# EAGLE board STM32F405RGT6 s (EAGLE 9.6.2)
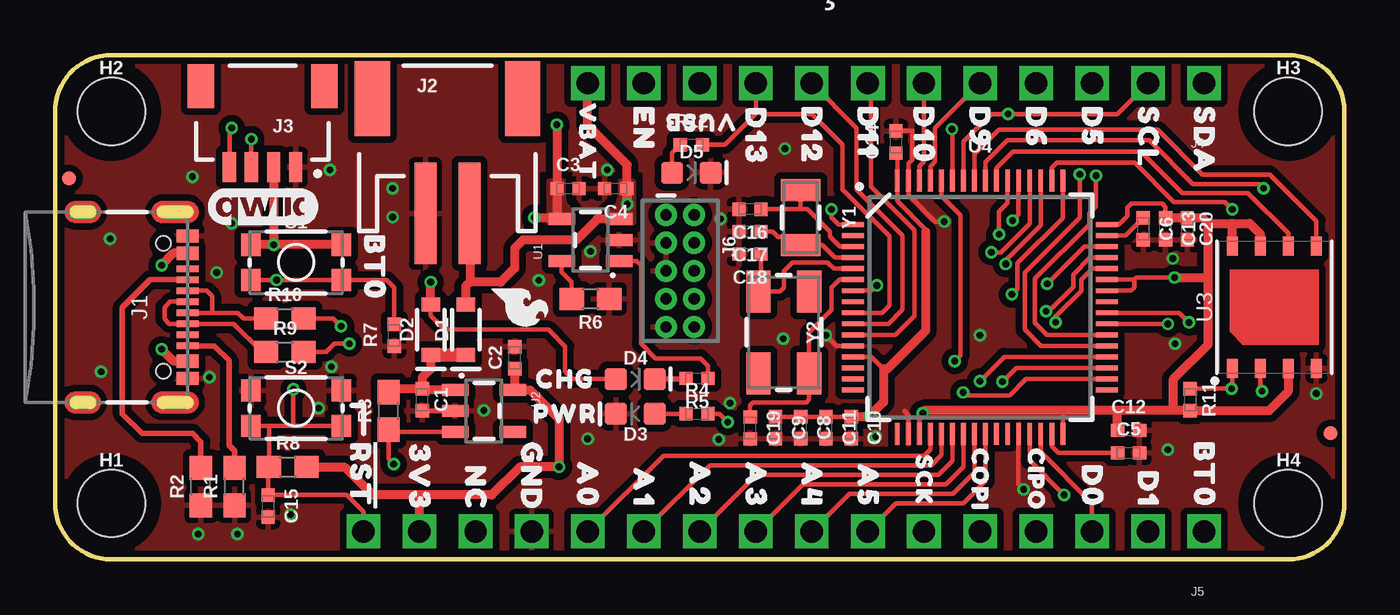
[diagram p0: board, top side]
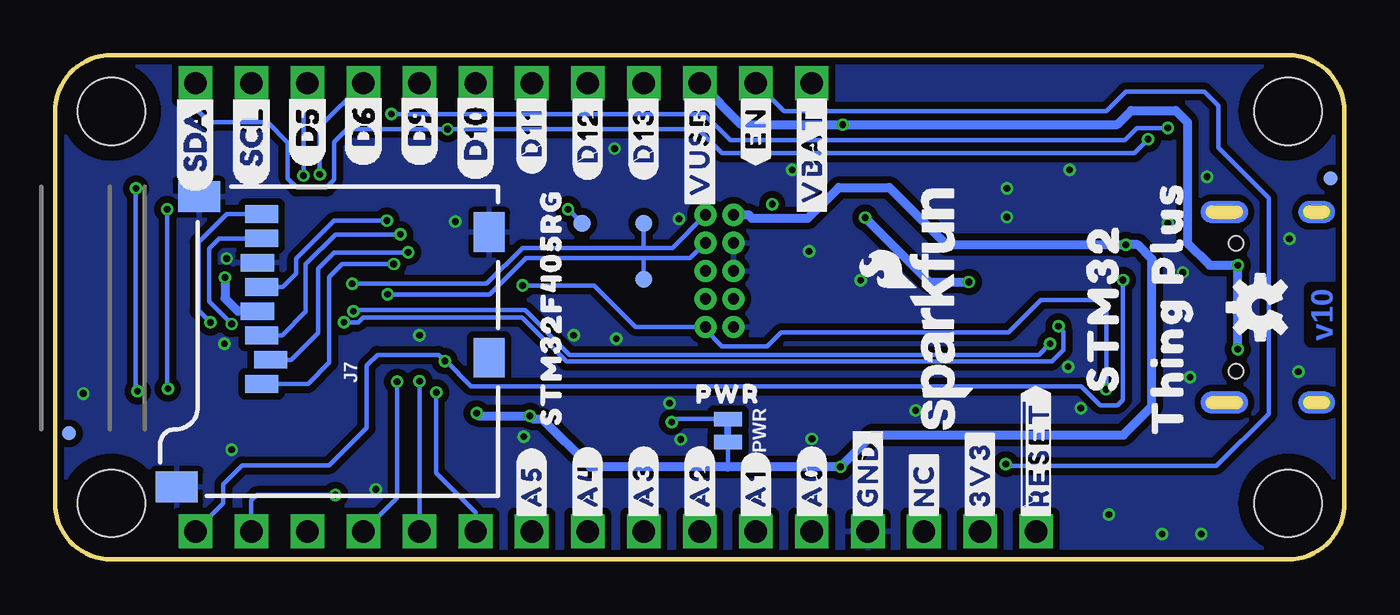
[diagram p1: board, bottom side, seen from below]

Size 58.42 x 22.86 mm. Coordinates in mm from the lower left corner, seen from the top.
Outline: 2.54,0 55.88,0 arc90 58.42,2.54 58.42,20.32 arc90 55.88,22.86 2.54,22.86 arc90 0,20.32 0,2.54 arc90 2.54,0
Copper layers (1*16): Top 0.035mm / dielectric 1.5mm / Bottom 0.035mm
Design rules "SparkFun-2-layer-FAB-LIMIT": minimum track width 4mil, minimum drill 6mil, track to track 4mil, track to pad 4mil, pad to pad 4mil, via to via 4mil, smd to smd 4mil, copper to edge 4mil, drill to drill 4mil, minimum pad ring 5mil, minimum via ring 5mil, stop-mask expansion 4mil, vias tented up to drill 25mil, thermal gap 10mil
Net classes: 1 power: width 0.762 mm

## Footprints (pad centres in the part's own frame; a part is rotated, then mirrored left to right if it is on the bottom)
0402-TIGHT = smd 0.6 x 0.6: 1 -0.5,0; 2 0.5,0
SOD-323 = smd 0.63 x 0.83: A 1.15,0; C -1.15,0
LED-0603 = smd 1 x 1: A -0.877,0; C 0.877,0
FIDUCIAL-MICRO = smd 0.635 x 0.635: 1 0,0
STAND-OFF-TIGHT = hole 3.048: 0,0
USB-C-16P-2LAYER-PADS = smd 0.3 x 1: A5 -1.25,-0.34; A6 -0.25,-0.34; A7 0.25,-0.34; A8 1.25,-0.34; B5 1.75,-0.34; B6 0.75,-0.34; B7 -0.75,-0.34; B8 -1.75,-0.34 | smd 0.6 x 1: GND -3.225,-0.34; GND2 3.225,-0.34; VBUS1 -2.45,-0.34; VBUS2 2.45,-0.34 | drill 0.4 pad 0.6 long: SHLD1 -4.318,-0.915; SHLD2 4.318,-0.915; SHLD3 -4.318,-5.095; SHLD4 4.318,-5.095 | hole 0.65: -2.89,-1.445; 2.89,-1.445
JST-2-SMD = smd 1 x 4.6: 1 -1,-3.7; 2 1,-3.7 | smd 1.6 x 3.4: NC1 -3.4,1.5; NC2 3.4,1.5
JST04_1MM_RA = smd 0.6 x 1.35: 1 -1.5,0; 2 -0.5,0; 3 0.5,0; 4 1.5,0 | smd 1.2 x 2: NC1 2.8,-3.675; NC2 -2.8,-3.675
1X12_SM_SQ_NOSILK = drill 1.016 pad 1.27 square: 1 0,0; 2 2.54,0; 3 5.08,0; 4 7.62,0; 5 10.16,0; 6 12.7,0; 7 15.24,0; 8 17.78,0; 9 20.32,0; 10 22.86,0; 11 25.4,0; 12 27.94,0
1X16_SM_SQ_NOSILK = drill 1.016 pad 1.27 square: 1 0,0; 2 2.54,0; 3 5.08,0; 4 7.62,0; 5 10.16,0; 6 12.7,0; 7 15.24,0; 8 17.78,0; 9 20.32,0; 10 22.86,0; 11 25.4,0; 12 27.94,0; 13 30.48,0; 14 33.02,0; 15 35.56,0; 16 38.1,0
2X5-PTH-1.27MM-NO_SILK = drill 0.508 pad 1: 1 -2.54,-0.635; 2 -2.54,0.635; 3 -1.27,-0.635; 4 -1.27,0.635; 5 0,-0.635; 6 0,0.635; 7 1.27,-0.635; 8 1.27,0.635; 9 2.54,-0.635; 10 2.54,0.635
MICRO-SD-SOCKET = smd 1.8 x 1.4: CD1 -2.05,0.4; CD2 -7.75,0.4 | smd 0.8 x 1.5: CS/DAT3 -7.84,10.3; DAT1 -1.24,10.7; DAT2 -8.94,10.7; DI/CMD -6.74,10.7; DO/DAT0 -2.34,10.7; GND -3.44,10.9; SCLK -4.54,10.7; VCC -5.64,10.9 | smd 1.4 x 1.9: GND1 -13.6,14.55; GND3 -0.45,13.55
SMT-JUMPER_2_NC_TRACE_NO-SILK = smd 0.66 x 1.27: 1 -0.521,0; 2 0.521,0
0603 = smd 1.1 x 1: 1 -0.85,0; 2 0.85,0
TACTILE_SWITCH_SMD_4.6X2.8MM = smd 0.9 x 1: 1 -2.05,-0.8; 2 2.05,-0.8; 3 2.05,0.8; 4 -2.05,0.8
PAD.03X.03 = smd 0.762 x 0.762: P$1 0,0
SOT23-5 = smd 0.55 x 1.2: 1 -0.95,-1.3; 2 0,-1.3; 3 0.95,-1.3; 4 0.95,1.3; 5 -0.95,1.3
WSON-8-6X5 = smd 0.85 x 0.5: 1 -2.775,1.905; 2 -2.775,0.635; 3 -2.775,-0.635; 4 -2.775,-1.905; 5 2.775,-1.905; 6 2.775,-0.635; 7 2.775,0.635; 8 2.775,1.905
TQFP64 = smd 0.22 x 1: 1 -3.75,-5.75; 2 -3.25,-5.75; 3 -2.75,-5.75; 4 -2.25,-5.75; 5 -1.75,-5.75; 6 -1.25,-5.75; 7 -0.75,-5.75; 8 -0.25,-5.75; 9 0.25,-5.75; 10 0.75,-5.75; 11 1.25,-5.75; 12 1.75,-5.75; 13 2.25,-5.75; 14 2.75,-5.75; 15 3.25,-5.75; 16 3.75,-5.75; 33 3.75,5.75; 34 3.25,5.75; 35 2.75,5.75; 36 2.25,5.75; 37 1.75,5.75; 38 1.25,5.75; 39 0.75,5.75; 40 0.25,5.75; 41 -0.25,5.75; 42 -0.75,5.75; 43 -1.25,5.75; 44 -1.75,5.75; 45 -2.25,5.75; 46 -2.75,5.75; 47 -3.25,5.75; 48 -3.75,5.75 | smd 1 x 0.22: 17 5.75,-3.75; 18 5.75,-3.25; 19 5.75,-2.75; 20 5.75,-2.25; 21 5.75,-1.75; 22 5.75,-1.25; 23 5.75,-0.75; 24 5.75,-0.25; 25 5.75,0.25; 26 5.75,0.75; 27 5.75,1.25; 28 5.75,1.75; 29 5.75,2.25; 30 5.75,2.75; 31 5.75,3.25; 32 5.75,3.75; 49 -5.75,3.75; 50 -5.75,3.25; 51 -5.75,2.75; 52 -5.75,2.25; 53 -5.75,1.75; 54 -5.75,1.25; 55 -5.75,0.75; 56 -5.75,0.25; 57 -5.75,-0.25; 58 -5.75,-0.75; 59 -5.75,-1.25; 60 -5.75,-1.75; 61 -5.75,-2.25; 62 -5.75,-2.75; 63 -5.75,-3.25; 64 -5.75,-3.75
CRYSTAL-SMD-3.2X1.5MM = smd 1 x 1.8: P$1 -1.25,0; P$2 1.25,0
CRYSTAL-SMD-5X3.2-4PAD = smd 1.9 x 1.1: 1 -1.85,-1.15; 2 1.85,-1.15; 3 1.85,1.15; 4 -1.85,1.15

## Placement (x,y rotation side)
C1  1.0uF  [0402-TIGHT]  16.64,7.24 270 top
C2  1.0uF  [0402-TIGHT]  20.83,9.14 90 top
C3  4.7uF  [0402-TIGHT]  23.24,16.81 0 top
C4  4.7uF  [0402-TIGHT]  25.4,16.81 180 top
C5  2.2uF  [0402-TIGHT]  48.64,4.83 0 top
C6  2.2uF  [0402-TIGHT]  49.3,14.99 270 top
C8  0.1uF  [0402-TIGHT]  33.78,5.97 270 top
C9  1.0uF  [0402-TIGHT]  32.64,5.97 270 top
C10  4.7uF  [0402-TIGHT]  36.07,5.97 270 top
C11  0.1uF  [0402-TIGHT]  34.92,5.97 270 top
C12  0.1uF  [0402-TIGHT]  48.64,5.84 0 top
C13  0.1uF  [0402-TIGHT]  50.32,14.99 270 top
C14  0.1uF  [0402-TIGHT]  38.1,18.92 90 top
C15  0.1uF  [0402-TIGHT]  9.65,2.41 270 top
C16  15pF  [0402-TIGHT]  31.49,15.88 180 top
C17  15pF  [0402-TIGHT]  31.49,14.86 180 top
C18  22pF  [0402-TIGHT]  31.49,13.84 180 top
C19  22pF  [0402-TIGHT]  31.5,5.96 270 top
C20  0.1uF  [0402-TIGHT]  51.31,14.99 270 top
D1  3A/10V/280mV  [SOD-323]  18.61,10.41 90 top
D2  3A/10V/280mV  [SOD-323]  17.02,10.41 90 top
D3  RED  [LED-0603]  26.29,6.6 180 top
D4  Yellow  [LED-0603]  26.29,8.18 0 top
D5  BLUE  [LED-0603]  28.83,17.53 0 top
FD1  FIDUCIALUFIDUCIAL  [FIDUCIAL-MICRO]  0.64,17.27 0 top
FD2  FIDUCIALUFIDUCIAL  [FIDUCIAL-MICRO]  0.64,17.27 0 bottom
FD3  FIDUCIALUFIDUCIAL  [FIDUCIAL-MICRO]  57.78,5.71 0 top
FD4  FIDUCIALUFIDUCIAL  [FIDUCIAL-MICRO]  57.78,5.71 0 bottom
H1  STAND-OFFTIGHT  [STAND-OFF-TIGHT]  2.54,2.54 0 top
H2  STAND-OFFTIGHT  [STAND-OFF-TIGHT]  2.54,20.32 0 top
H3  STAND-OFFTIGHT  [STAND-OFF-TIGHT]  55.88,20.32 0 top
H4  STAND-OFFTIGHT  [STAND-OFF-TIGHT]  55.88,2.54 0 top
J1  [USB-C-16P-2LAYER-PADS]  6.35,11.43 270 top
J2  [JST-2-SMD]  17.78,19.38 0 top
J3  QWIIC_RA  [JST04_1MM_RA]  9.4,17.78 180 top
J4  [1X12_SM_SQ_NOSILK]  52.07,21.59 180 top
J5  [1X16_SM_SQ_NOSILK]  52.07,1.27 180 top
J6  CORTEX_DEBUG  [2X5-PTH-1.27MM-NO_SILK]  28.32,13.08 270 top
J7  MICRO-SD  [MICRO-SD-SOCKET]  38.35,16.89 90 bottom
LOGO1  QWIIC_LOGO_5MM  [QWIIC_5MM]  9.4,16 0 top
LOGO2  SFE_LOGO_NAME_FLAME.1_INCH  [SFE_LOGO_NAME_FLAME_.1]  18.29,11.43 90 bottom
LOGO3  OSHW-LOGOS  [OSHW-LOGO-S]  3.81,11.43 90 bottom
PWR  [SMT-JUMPER_2_NC_TRACE_NO-SILK]  27.94,5.84 270 bottom
R1  5.1k  [0603]  8.13,3.3 90 top
R2  5.1k  [0603]  6.6,3.3 90 top
R3  10k  [0603]  15.11,6.73 90 top
R4  1k  [0402-TIGHT]  29.08,6.6 0 top
R5  1k  [0402-TIGHT]  29.08,8.2 180 top
R6  2.0k  [0603]  24.26,11.81 180 top
R7  100k  [0402-TIGHT]  15.37,10.16 90 top
R8  4.7k  [0603]  10.54,4.19 0 top
R9  22  [0603]  10.41,9.4 0 top
R10  22  [0603]  10.41,10.92 0 top
R11  100k  [0402-TIGHT]  51.44,7.24 270 top
R12  1k  [0402-TIGHT]  28.83,18.8 0 top
S1  [TACTILE_SWITCH_SMD_4.6X2.8MM]  10.92,13.46 0 top
S2  [TACTILE_SWITCH_SMD_4.6X2.8MM]  10.92,6.86 0 top
TP1  [PAD.03X.03]  31.75,15.24 0 bottom
TP2  [PAD.03X.03]  31.75,12.7 0 bottom
U1  MCP73831  [SOT23-5]  24.26,14.48 90 top
U2  3.3V  [SOT23-5]  19.43,6.73 270 top
U3  W25QXX128MBIT-6X5  [WSON-8-6X5]  55.24,11.43 90 top
U4  STM32F405RGT6  [TQFP64]  41.91,11.43 270 top
U$1  [D53]  46.99,17.78 90 bottom
U$2  [#RST#0]  13.97,5.97 270 top
U$3  [BT00]  14.48,11.05 270 top
U$4  [D130]  31.75,19.18 270 top
U$5  [PWR0]  23.11,6.6 0 top
U$6  [CHG0]  23.11,8.18 0 top
U$7  [##RESET##0]  13.97,1.65 90 bottom
U$8  [#3V3#0]  16.51,1.65 90 bottom
U$9  [#NC#0]  19.05,1.65 90 bottom
U$10  [#GND#0]  21.59,1.65 90 bottom
U$11  [#A0#0]  24.13,1.65 90 bottom
U$12  [#A1#0]  26.67,1.65 90 bottom
U$13  [#A2#0]  29.21,1.65 90 bottom
U$14  [#A3#0]  31.75,1.65 90 bottom
U$15  [#A4#0]  34.29,1.65 90 bottom
U$16  [#A5#0]  36.83,1.65 90 bottom
U$23  [D62]  44.45,17.78 90 bottom
U$24  [D91]  41.91,17.78 90 bottom
U$25  [D100]  39.37,17.14 90 bottom
U$26  [SCL4]  49.53,16.89 90 bottom
U$27  [SDA5]  52.07,16.64 90 bottom
U$29  [#D11#0]  36.83,21.21 90 bottom
U$30  [#D12#0]  34.29,21.21 90 bottom
U$31  [#D13#0]  31.75,21.21 90 bottom
U$32  [#VUSB#0]  29.21,21.21 90 bottom
U$33  [#EN#0]  26.67,21.21 90 bottom
U$34  [#VBAT#0]  24.13,21.21 90 bottom
U$35  [3V30]  16.51,1.52 270 top
U$36  [NC0]  19.05,1.52 270 top
U$37  [GND0]  21.59,1.52 270 top
U$38  [A00]  24.13,1.65 270 top
U$39  [A10]  26.67,1.65 270 top
U$40  [A20]  29.21,1.65 270 top
U$41  [A30]  31.75,1.65 270 top
U$42  [A40]  34.29,1.65 270 top
U$43  [A50]  36.83,1.65 270 top
U$44  [SCK0]  39.37,1.91 270 top
U$45  [COPI0]  41.91,1.65 270 top
U$46  [CIPO0]  44.45,1.65 270 top
U$47  [D00]  46.99,1.65 270 top
U$48  [D10]  49.53,1.65 270 top
U$49  [BT00]  52.07,1.65 270 top
U$50  [VBAT_0]  24.13,21.21 270 top
U$51  [EN_0]  26.67,21.21 270 top
U$52  [D50]  46.99,21.21 270 top
U$53  [D60]  44.45,21.21 270 top
U$54  [D90]  41.91,21.21 270 top
U$55  [D100]  39.37,21.21 270 top
U$56  [D110]  36.83,21.21 270 top
U$57  [D120]  34.29,21.21 270 top
U$58  [PWR0]  27.94,7.49 0 bottom
U$59  [SCL_0]  49.53,21.21 270 top
U$60  [SDA_0]  52.07,21.21 270 top
U$61  [VUSB0]  29.21,19.81 180 top
U$62  [STM320]  10.92,11.43 90 bottom
U$63  [THING_PLUS0]  8,11.43 90 bottom
U$64  [STM32F405RG0]  35.94,11.43 90 bottom
U$65  [SFE_LOGO_FLAME_.1]  21.08,11.43 270 top
VB  [PAD.03X.03]  34.54,15.24 0 bottom
Y1  32.768kHz  [CRYSTAL-SMD-3.2X1.5MM]  33.78,15.49 270 top
Y2  12MHz  [CRYSTAL-SMD-5X3.2-4PAD]  33.02,10.29 270 top

## Library data of the parts
C1 C2 C9 = SparkFun-Capacitors; PROD_ID: CAP-12417
C3 C4 C10 = SparkFun-Capacitors; PROD_ID: CAP-14240
C5 C6 = SparkFun-Capacitors; PROD_ID: CAP-14232
C8 C11-C15 C20 = SparkFun-Capacitors; PROD_ID: CAP-15083
C16 C17 = SparkFun-Capacitors; PROD_ID: CAP-13063
C18 C19 = SparkFun-Capacitors; PROD_ID: CAP-14674
D1 D2 = SparkFun-DiscreteSemi; PROD_ID: DIO-14072
D3 = SparkFun-LED; PROD_ID: DIO-00819
D4 = SparkFun-LED; PROD_ID: DIO-09003
D5 = SparkFun-LED; PROD_ID: DIO-08575
FD1-FD4 LOGO1-LOGO3 U$65 = SparkFun-Aesthetics
H1-H4 = SparkFun-Hardware
J1 = SparkFun-Connectors; PROD_ID: CONN-14122
J2 = SparkFun-Connectors; PROD_ID: CONN-11443; SF_ID: PRT-08612
J3 = SparkFun-Connectors; PROD_ID: CONN-13694
J4-J6 TP1 TP2 VB = SparkFun-Connectors
J7 = SparkFun-Connectors; PROD_ID: CONN-07820
PWR = SparkFun-Jumpers
R1 R2 = SparkFun-Resistors; PROD_ID: RES-12083
R3 = SparkFun-Resistors; PROD_ID: RES-00824
R4 R5 R12 = SparkFun-Resistors; PROD_ID: RES-14342
R6 = SparkFun-Resistors; PROD_ID: RES-08296
R7 R11 = SparkFun-Resistors; PROD_ID: RES-13495
R8 = SparkFun-Resistors; PROD_ID: RES-07857
R9 R10 = SparkFun-Resistors; PROD_ID: RES-08698
S1 S2 = SparkFun-Switches; PROD_ID: SWCH-13065
U1 = SparkFun-IC-Power; PROD_ID: IC-09995
U2 = SparkFun-IC-Power; PROD_ID: VREG-12457
U3 = SparkFun-MicroMod; PROD_ID: IC-15107
U4 = STM32_Temp; PROD_ID: IC-11709
U$1 U$23-U$27 = buzzard_labels
U$2-U$16 U$29-U$64 = output
Y1 = SparkFun-Clocks; PROD_ID: XTAL-13062
Y2 = SparkFun-Clocks; PROD_ID: XTAL-08297

## Nets
3.3V: C2.1 C8.1 C9.1 C10.1 C11.1 C12.1 C13.1 C14.1 C20.1 J3.2 J5.15 J6.1 J7.VCC PWR.2 R8.2 R11.2 S1.3 S1.4 U2.5 U3.3 U3.7 U3.8 U4.13 U4.19 U4.32 U4.42 U4.43 U4.48 U4.64
32KHZ_IN: C16.1 U4.3 Y1.P$1
32KHZ_OUT: C17.1 U4.4 Y1.P$2
!RESET: C15.1 J5.16 J6.10 R8.1 S2.1 S2.2 U4.7
A0: J5.12 U4.20
A1: J5.11 U4.21
A2: J5.10 U4.22
A3: J5.9 U4.23
A4: J5.8 U4.24
A5: J5.7 U4.25
BOOT0: J5.1 R7.2 S1.1 S1.2 U4.60
CIPO: J5.4 U4.35
COPI: J5.5 U4.36
D0/RX: J5.3 U4.30
D1/TX: J5.2 U4.29
D5: J4.3 U4.38
D6: J4.4 U4.37
D9: J4.5 U4.61
D10: J4.6 U4.62
D11: J4.7 U4.11
D12: J4.8 U4.10
D13: J4.9 R12.2 U4.9
D+: R9.2 U4.45
D-: R10.2 U4.44
EN: J4.11 R3.1 U2.3
FLASH_!CS: R11.1 U3.1 U4.50
FLASH_SCK: U3.6 U4.55
FLASH_SDI: U3.5 U4.57
FLASH_SDO: U3.2 U4.56
GND: C1.2 C2.2 C3.2 C4.2 C5.2 C6.2 C8.2 C9.2 C10.2 C11.2 C12.2 C13.2 C14.2 C15.2 C16.2 C17.2 C18.2 C19.2 C20.2 D3.C D5.C J1.GND J1.GND2 J1.SHLD1 J1.SHLD2 J1.SHLD3 J1.SHLD4 J2.1 J3.1 J5.13 J6.3 J6.5 J6.9 J7.CD1 J7.GND J7.GND1 J7.GND3 R1.1 R2.1 R6.1 R7.1 S2.3 S2.4 U1.2 U2.2 U3.4 U4.12 U4.18 U4.28 U4.63
N$1: D5.A R12.1
N$2: PWR.1 R4.2
N$3: J1.A6 J1.B6 R9.1
N$6: J1.A7 J1.B7 R10.1
N$7: D3.A R4.1
N$8: R6.2 U1.5
N$9: J1.A5 R2.2
N$10: J1.B5 R1.2
N$14: D4.C R5.2
N$15: R5.1 U1.1
N$16: C5.1 U4.31
N$18: C6.1 U4.47
OSC_IN: C18.1 U4.5 Y2.1
OSC_OUT: C19.1 U4.6 Y2.3
SCK: J5.6 U4.34
SCL: J3.4 J4.2 U4.58
SDA: J3.3 J4.1 U4.59
SDIO_CLK: J7.SCLK U4.53
SDIO_CMD: J7.DI/CMD U4.54
SDIO_D0: J7.DO/DAT0 U4.39
SDIO_D1: J7.DAT1 U4.40
SDIO_D2: J7.DAT2 U4.51
SDIO_D3: J7.CS/DAT3 U4.52
SWCLK: J6.4 TP2.P$1 U4.49
SWDIO: J6.2 TP1.P$1 U4.46
V_BATT: C4.1 D1.A J2.2 J4.12 U1.3
V_USB: C3.1 D2.A D4.A J1.VBUS1 J1.VBUS2 J4.10 U1.4
VB: U4.1 VB.P$1
VIN: C1.1 D1.C D2.C R3.2 U2.1

## Tracks (layer width: path | path; a pad name or v marks a point on that pad's centre or on a via)
3.3V  (via drill 0.3)
  Top 0.203: C14.1 38.16,18.36 U4.64 38.16,16.25 39.45,14.96 39.45,14.86 | C9.1 C8.1 C11.1 C10.1 | U4.13 37,9.18 37.54,8.64 | U4.32 45.66,6.76 45.67,6.76 | U4.42 48.76,12.18 48.9,12.32 48.9,12.68 | 48.9,12.68 U4.43 | v50.72,12.78 48.99,12.78 48.9,12.68 | C13.1 50.32,15.98 50.16,16.13 48.77,16.13 48.59,15.95 48.59,15.57 48.2,15.18 U4.48 | U4.19 39.16,6.47 v39.32,6.63
  Top 0.406: v50.72,12.78 52.25,12.78 | 52.25,12.78 52.25,15.23 | 52.25,15.23 53.34,15.23 | 53.34,15.23 54.13,15.23 54.61,14.76 U3.7 | U3.8 53.34,15.23 | U3.3 55.88,7.62 55,6.74 R11.2 51.44,6.76 50.67,6.76 | C10.1 36.87,6.47 v36.91,6.5 37.54,7.14 37.54,8.64 37.72,8.64 39.45,10.36 39.45,14.86 | 50.67,6.76 48.14,6.76 | 48.14,6.76 45.67,6.76 39.45,6.76 v39.32,6.63 | C12.1 48.14,6.76 | R8.2 13.11,4.19 14.38,2.92 16.51,2.92 | 16.51,2.92 19.79,2.92 21.06,4.19 v22.84,4.19 22.84,6.38 21.53,7.68 U2.5 20.83,7.78 C2.1 | S1.3 v9.9,14.26 | v9.9,14.26 S1.4 | J3.2 v9.9,14.26 | J5.15 16.51,2.92 | 50.67,6.76 50.67,8.18 52.25,9.75 52.25,12.78 | C13.1 C20.1 51.99,15.49 52.25,15.23
  Bottom 0.203: PWR.2 27.94,4.19
  Bottom 0.406: v50.72,12.78 50.72,11.83 50.14,11.25 J7.VCC | J6.1 27,15.62 26.85,15.47 24.31,15.47 22.91,16.87 20.62,16.87 18.02,14.26 v9.9,14.26 9.37,14.26 8.71,13.61 8.71,6.93 10.01,5.64 21.39,5.64 v22.84,4.19 27.94,4.19 34.16,4.19 36.35,6.38 36.78,6.38 v36.91,6.5 39.19,6.5 v39.32,6.63
32KHZ_IN
  Top 0.203: U4.3 35.55,14.18 35.1,14.63 35.1,14.86 34.09,15.88 33.78,15.88 | 33.78,15.88 C16.1 | Y1.P$1 33.78,15.88
32KHZ_OUT
  Top 0.203: U4.4 35.34,13.68 34.78,14.24 Y1.P$2 33.78,14.61 32.75,14.61 32.5,14.86 C17.1
!RESET  (via drill 0.3)
  Top 0.203: S2.1 9.69,6.06 | 10.79,6.06 9.69,6.06 | v10.79,7.71 10.79,6.06 | 10.79,6.06 S2.2 | 9.69,6.06 R8.1 9.65,4.19 9.65,2.92 | C15.1 9.65,2.92 | J5.16 13.97,2.16 13.21,2.92 9.65,2.92 | U4.7 37,12.18 v37.24,12.42
  Bottom 0.203: v37.24,12.42 34.01,12.42 32.13,10.54 J6.10 28.96,10.41 28.19,9.65 26.16,9.65 25.53,10.29 15.21,10.29 13.74,11.76 11.07,11.76 10.79,11.48 v10.79,7.71
A0
  Top 0.203: U4.20 39.66,4.99 39.37,4.7 27.56,4.7 J5.12
A1
  Top 0.203: U4.21 40.16,4.73 39.7,4.27 29.67,4.27 J5.11
A2
  Top 0.203: U4.22 40.66,4.46 40.03,3.83 31.77,3.83 J5.10
A3
  Top 0.203: U4.23 41.16,4.2 40.36,3.4 33.88,3.4 J5.9
A4
  Top 0.203: U4.24 41.66,3.94 40.69,2.97 35.99,2.97 J5.8
A5
  Top 0.203: U4.25 42.16,3.55 41.15,2.54 38.1,2.54 J5.7
BOOT0  (via drill 0.3)
  Top 0.203: R7.2 15.37,12.32 15.02,12.66 S1.2 v10.03,12.66 S1.1 | U4.60 40.16,16.47 41.02,15.61 41.02,9.25 v40.77,8.99
  Bottom 0.203: J5.1 50.8,2.54 50.8,3.4 49.94,4.27 46,4.27 44.3,5.97 44.3,8.79 43.81,9.27 41.05,9.27 v40.77,8.99 40.72,8.99 39.57,7.85 11.91,7.85 11.05,6.99 10.29,6.99 10.03,7.24 v10.03,12.66
CIPO  (via drill 0.3)
  Top 0.203: v42.93,8.05 43.55,8.68 U4.35
  Bottom 0.203: J5.4 42.93,2.79 v42.93,8.05
COPI  (via drill 0.3)
  Top 0.203: U4.36 43.01,9.18 v41.91,8.08
  Bottom 0.203: J5.5 v41.91,8.08
D0/RX
  Top 0.203: J5.3 46.99,2.54 44.66,4.87 U4.30
D1/TX  (via drill 0.3)
  Top 0.203: U4.29 44.16,4.48 v45.72,2.92
  Bottom 0.203: v45.72,2.92 49.28,2.92 49.53,2.67 J5.2
D5  (via drill 0.3)
  Top 0.203: U4.38 44.94,10.18 44.4,10.72 44.4,12.72 46.86,15.19 46.86,15.7 47.17,16 v47.17,17.4
  Bottom 0.203: J4.3 47.17,21.41 v47.17,17.4
D6  (via drill 0.3)
  Top 0.203: U4.37 44.68,9.68 43.94,10.41 43.94,13 46.43,15.49 v46.43,17.45
  Bottom 0.203: v46.43,17.45 46.43,19.61 J4.4
D9
  Top 0.203: U4.61 39.66,17.82 39.88,18.03 39.88,19.56 J4.5
D10
  Top 0.203: U4.62 39.16,17.82 39.37,18.03 J4.6
D11
  Top 0.203: U4.11 38.07,10.18 38.93,11.04 38.93,14.92 36.96,16.89 36.96,21.46 J4.7
D12
  Top 0.203: U4.10 37.76,10.68 38.4,11.32 38.4,14.69 36.32,16.76 36.32,19.56 J4.8
D13
  Top 0.203: U4.9 37.47,11.18 37.8,11.51 37.8,14.66 35.69,16.76 35.69,18.8 34.29,20.19 32,20.19 31.87,20.32 | 31.87,20.32 31.75,20.44 J4.9 | R12.2 30.35,18.8 31.87,20.32
D+  (via drill 0.3)
  Top 0.203: R9.2 12.28,9.4 12.66,9.78 v13.34,9.78 | v44.91,11.25 45.03,11.25 46.14,12.35 46.14,12.92 46.9,13.68 U4.45
  Bottom 0.2: v44.91,11.25 44.86,11.3 37.13,11.3
  Bottom 0.203: 37.13,11.3 35.1,9.27 13.84,9.27 v13.34,9.78
D-  (via drill 0.3)
  Top 0.203: R10.2 12.6,10.92 v12.95,10.57 | U4.44 47.01,13.18 46.5,12.68 46.5,12.17 45.34,11 v45.34,10.75 | v12.95,10.57
  Bottom 0.2: v45.34,10.75 44.7,10.75 44.48,10.97 37.26,10.97
  Bottom 0.203: 37.26,10.97 35.25,8.97 13.26,8.97 12.72,9.5 12.72,10.34 v12.95,10.57
EN  (via drill 0.3)
  Top 0.203: U2.3 15.21,5.78 R3.1 15.11,4.55 v15.34,4.32
  Bottom 0.203: v15.34,4.32 15.27,4.24 5.79,4.24 3.43,6.6 3.43,16.38 5.71,18.67 5.71,20.57 6.35,21.21 9.91,21.21 10.79,20.32 25.4,20.32 J4.11
FLASH_!CS  (via drill 0.3)
  Top 0.203: U3.1 53.34,7.74 v53.31,7.74 R11.1 | U4.50 45.16,17.75 45.39,17.98 48.92,17.98 50.7,16.2 53.01,16.2 v53.34,15.88
  Bottom 0.203: v53.34,15.88 53.34,7.76 v53.31,7.74
FLASH_SCK
  Top 0.203: U3.6 55.88,14.78 54.05,16.61 51.08,16.61 49.2,18.49 43.41,18.49 42.66,17.74 U4.55
FLASH_SDI
  Top 0.203: U4.57 41.66,18.37 42.77,19.48 49.96,19.48 51.99,17.45 55.04,17.45 57.15,15.34 U3.5
FLASH_SDO  (via drill 0.3)
  Top 0.203: U4.56 42.16,18 43.16,19 49.58,19 51.56,17.02 54.56,17.02 v54.76,16.82 | U3.2 54.61,7.7 v54.69,7.62
  Bottom 0.203: v54.76,16.82 54.76,7.7 v54.69,7.62
GND  (via drill 0.3)
  Top 0.203: U2.2 C1.2 | U4.12 35.41,9.68 v34.92,10.16 | C14.2 38.11,19.43 38.85,19.43 38.85,18.13 38.66,17.94 U4.63 38.66,16.53 39.88,15.32 v40.28,15.32 | U4.28 43.66,3.41 v43.89,3.17 | U4.18 38.66,6.55 38.48,6.73
  other vias: 25.02,17.65 6.99,8.26 8,15.24 6.48,1.14 8.26,1.14 10.67,2.03 19.43,6.76 11.94,6.86 12.45,17.65 15.29,16.81 15.29,15.52 21.92,12.65 24.26,13.97 32.99,10.01 30.15,15.44 12.52,8.74 50.75,9.78 50.42,4.98 30.58,7.09 24.13,5.46 2.49,14.53 2.08,8.51 7.32,13 6.22,17.35 30.07,5.44 37.19,5.56 33.07,18.62 57.15,7.52 41.91,10.16 50.65,13.64
  pour Top (isolate 0.305, rank 2): 0,0 0,22.86 58.42,22.86 58.42,0
  pour Bottom (isolate 0.305, rank 2): 0,22.86 0,0 58.42,0 58.42,22.86
N$1
  Top 0.203: R12.1 27.95,18.42 D5.A
N$2  (via drill 0.3)
  Top 0.203: v30.48,6.22 30.1,6.6 R4.2
  Bottom 0.203: PWR.1 30.34,6.36 v30.48,6.22
N$3
  Top 0.203: R9.1 9.37,9.4 8.09,10.68 J1.B6 5.17,10.68 4.95,10.9 4.95,11.43 5.2,11.68 J1.A6
N$6
  Top 0.203: R10.1 8.53,10.92 8.28,11.18 7.11,11.18 | J1.A7 7.11,11.18 | J1.B7 6.87,12.18 7.11,11.94 7.11,11.18
N$7
  Top 0.203: R4.1 D3.A
N$8
  Top 0.203: U1.5 22.96,13.02 23.41,12.57 R6.2
N$9
  Top 0.254: R2.2 6.6,5.33 6.22,5.71 3.94,5.71 3.05,6.6 3.05,11.43 4.3,12.68 J1.A5
N$10
  Top 0.254: J1.B5 7.21,9.68 7.87,9.02 7.87,5.17 8.13,4.91 R1.2
N$14
  Top 0.254: R5.2 28.56,8.18 D4.C
N$15
  Top 0.203: U1.1 26.35,13.53 26.54,13.34 26.54,9.78 27.2,9.12 29.23,9.12 29.58,8.77 R5.1
N$16
  Top 0.203: C5.1 45.47,4.83 45.16,5.13 U4.31
N$18
  Top 0.203: C6.1 48.49,14.68 U4.47
OSC_IN
  Top 0.203: U4.5 35.28,13.18 35,13.46 33.4,13.46 33.02,13.08 33.02,12.32 32.84,12.14 Y2.1 31.99,12.26 C18.1
OSC_OUT
  Top 0.203: C19.1 31.5,6.99 31.62,7.11 34.04,7.11 34.17,7.25 Y2.3 34.17,10.29 35.18,11.3 35.18,12.32 35.54,12.68 U4.6
SCK  (via drill 0.3)
  Top 0.203: v41.15,7.57 41.27,7.44 43.26,7.44 43.99,8.18 U4.34
  Bottom 0.203: J5.6 39.37,2.13 41.15,3.91 v41.15,7.57
SCL  (via drill 0.3)
  Top 0.203: U4.58 41.16,18.93 42.42,20.19 v43.18,20.19 48.13,20.19 J4.2 | J3.4 7.9,19.45 v8,19.56
  Bottom 0.203: v8,19.56 9.4,19.56 9.96,19 27.82,19 29.01,20.19 v43.18,20.19
SDA  (via drill 0.3)
  Top 0.203: v40.64,19.51 40.66,19.49 U4.59 | v8.89,19.05 J3.3
  Bottom 0.203: J4.1 52.07,20.45 51.44,19.81 48.79,19.81 47.88,18.9 47.88,17.27 47.46,16.85 46.14,16.85 45.78,17.21 45.78,18.91 45.19,19.51 v40.64,19.51 29.29,19.51 28.19,18.41 9.53,18.41 v8.89,19.05
SDIO_CLK  (via drill 0.3)
  Top 0.203: v43.39,15.36 43.66,15.63 U4.53
  Bottom 0.203: J7.SCLK 48.1,12.35 47.49,12.96 47.49,13.64 45.78,15.36 v43.39,15.36
SDIO_CMD  (via drill 0.3)
  Top 0.203: v42.77,14.73 42.77,15.77 43.16,16.16 U4.54
  Bottom 0.203: J7.DI/CMD 48.14,10.15 47.06,11.23 47.06,13.39 45.72,14.73 v42.77,14.73
SDIO_D0  (via drill 0.3)
  Top 0.203: v50.42,10.67 v50.42,10.68 U4.39
  Bottom 0.203: v50.42,10.67 51.44,11.68 51.44,14.1 50.98,14.55 J7.DO/DAT0
SDIO_D1  (via drill 0.3)
  Top 0.203: v51.38,10.74 50.95,11.18 U4.40
  Bottom 0.2: J7.DAT1 50.64,15.65 51.92,14.38 51.92,11.28
  Bottom 0.203: 51.92,11.28 v51.38,10.74
SDIO_D2  (via drill 0.3)
  Top 0.203: v43.08,13.39 43.08,13.56 44.66,15.14 U4.51
  Bottom 0.203: J7.DAT2 46.96,7.95 46,8.92 46,12.8 45.41,13.39 v43.08,13.39
SDIO_D3  (via drill 0.3)
  Top 0.203: v42.42,13.92 42.86,13.92 44.16,15.22 U4.52
  Bottom 0.203: J7.CS/DAT3 47.72,9.05 46.5,10.27 46.5,13.19 45.77,13.92 v42.42,13.92
SWCLK  (via drill 0.3)
  Top 0.203: U4.49 45.66,15.48 43.61,13.44 43.61,12.27 v43.36,12.01
  Bottom 0.203: v43.36,12.01 38.73,12.01 37.08,13.66 31.75,13.66 | 31.75,13.66 29.64,13.66 J6.4 | TP2.P$1 31.75,13.66
SWDIO  (via drill 0.3)
  Top 0.203: U4.46 46.64,14.18 v44.96,12.5
  Bottom 0.203: v44.96,12.5 38.86,12.5 37.24,14.12 31.75,14.12 | 31.75,14.12 30.45,14.12 J6.2 | TP1.P$1 31.75,14.12
V_BATT  (via drill 0.3)
  Top 0.406: C4.1 25.93,16.79 v25.93,16.1 25.93,17.89 24.13,19.68 J4.12 | U1.3 24.57,15.43 23.62,14.48 21.21,14.48 20.83,14.1 20.83,13.21 20.19,12.57 18.8,12.57 | 18.8,12.57 18.61,12.38 D1.A | J2.2 18.8,15.68 18.8,12.57
  pour Top (isolate 0.305, no thermals): 26.24,17.14 26.24,15.24 25.02,15.24 25.02,15.62 25.53,16.13 25.53,17.14
V_USB  (via drill 0.3)
  Top 0.203: D2.A 17.02,11.05 17.65,10.41 22.35,10.41 23.11,9.65 23.11,8.51 23.44,8.18 D4.A
  Top 0.406: J1.VBUS2 5.37,8.98 v4.83,9.53 | J1.VBUS1 5.36,13.88 v4.83,13.35 v4.83,13.34 | C3.1 22.74,15.49 v21.72,15.49 22.73,15.49 v22.73,19.71 | D2.A v17.02,12.57
  Bottom 0.406: v4.83,9.53 v4.83,13.34 6.1,13.34 7.11,14.35 7.11,19.81 7.64,20.34 9.65,20.34 10.29,19.71 v22.73,19.71 27.33,19.71 J4.10 | v21.72,15.49 18.8,12.57 v17.02,12.57
  pour Top (isolate 0.305, no thermals): 22.35,17.17 22.35,15.24 23.5,15.24 23.5,15.62 23.09,16.23 23.09,17.17
VB  (via drill 0.3)
  Top 0.203: U4.1 35.49,15.18 35.18,15.49 v35.18,15.88
  Bottom 0.203: VB.P$1 v35.18,15.88
VIN
  Top 0.406: U2.1 16.7,7.68 C1.1 | R3.2 15.27,7.74 C1.1 | D2.C 17.02,8.63 16.64,8.25 C1.1
  Top 0.61: D2.C D1.C

## Text on the board
Bottom: v10
tPlace: STM32F405 ARM GELİŞTİRME KARTI